# Altium PCB Pedal_Filters.PcbDoc (part 2 of 4)
Units mm, origin at the board's own origin, x right, y up, seen from the top; angles counter-clockwise.
Board outline 120.65 x 86.55 mm, 4 copper layers (Top Layer, Layer 1, Layer 2, Bottom Layer); 245 components, 181 nets, 879 pads, 470 vias.
Unrouted connection lines stored in the file: 24.
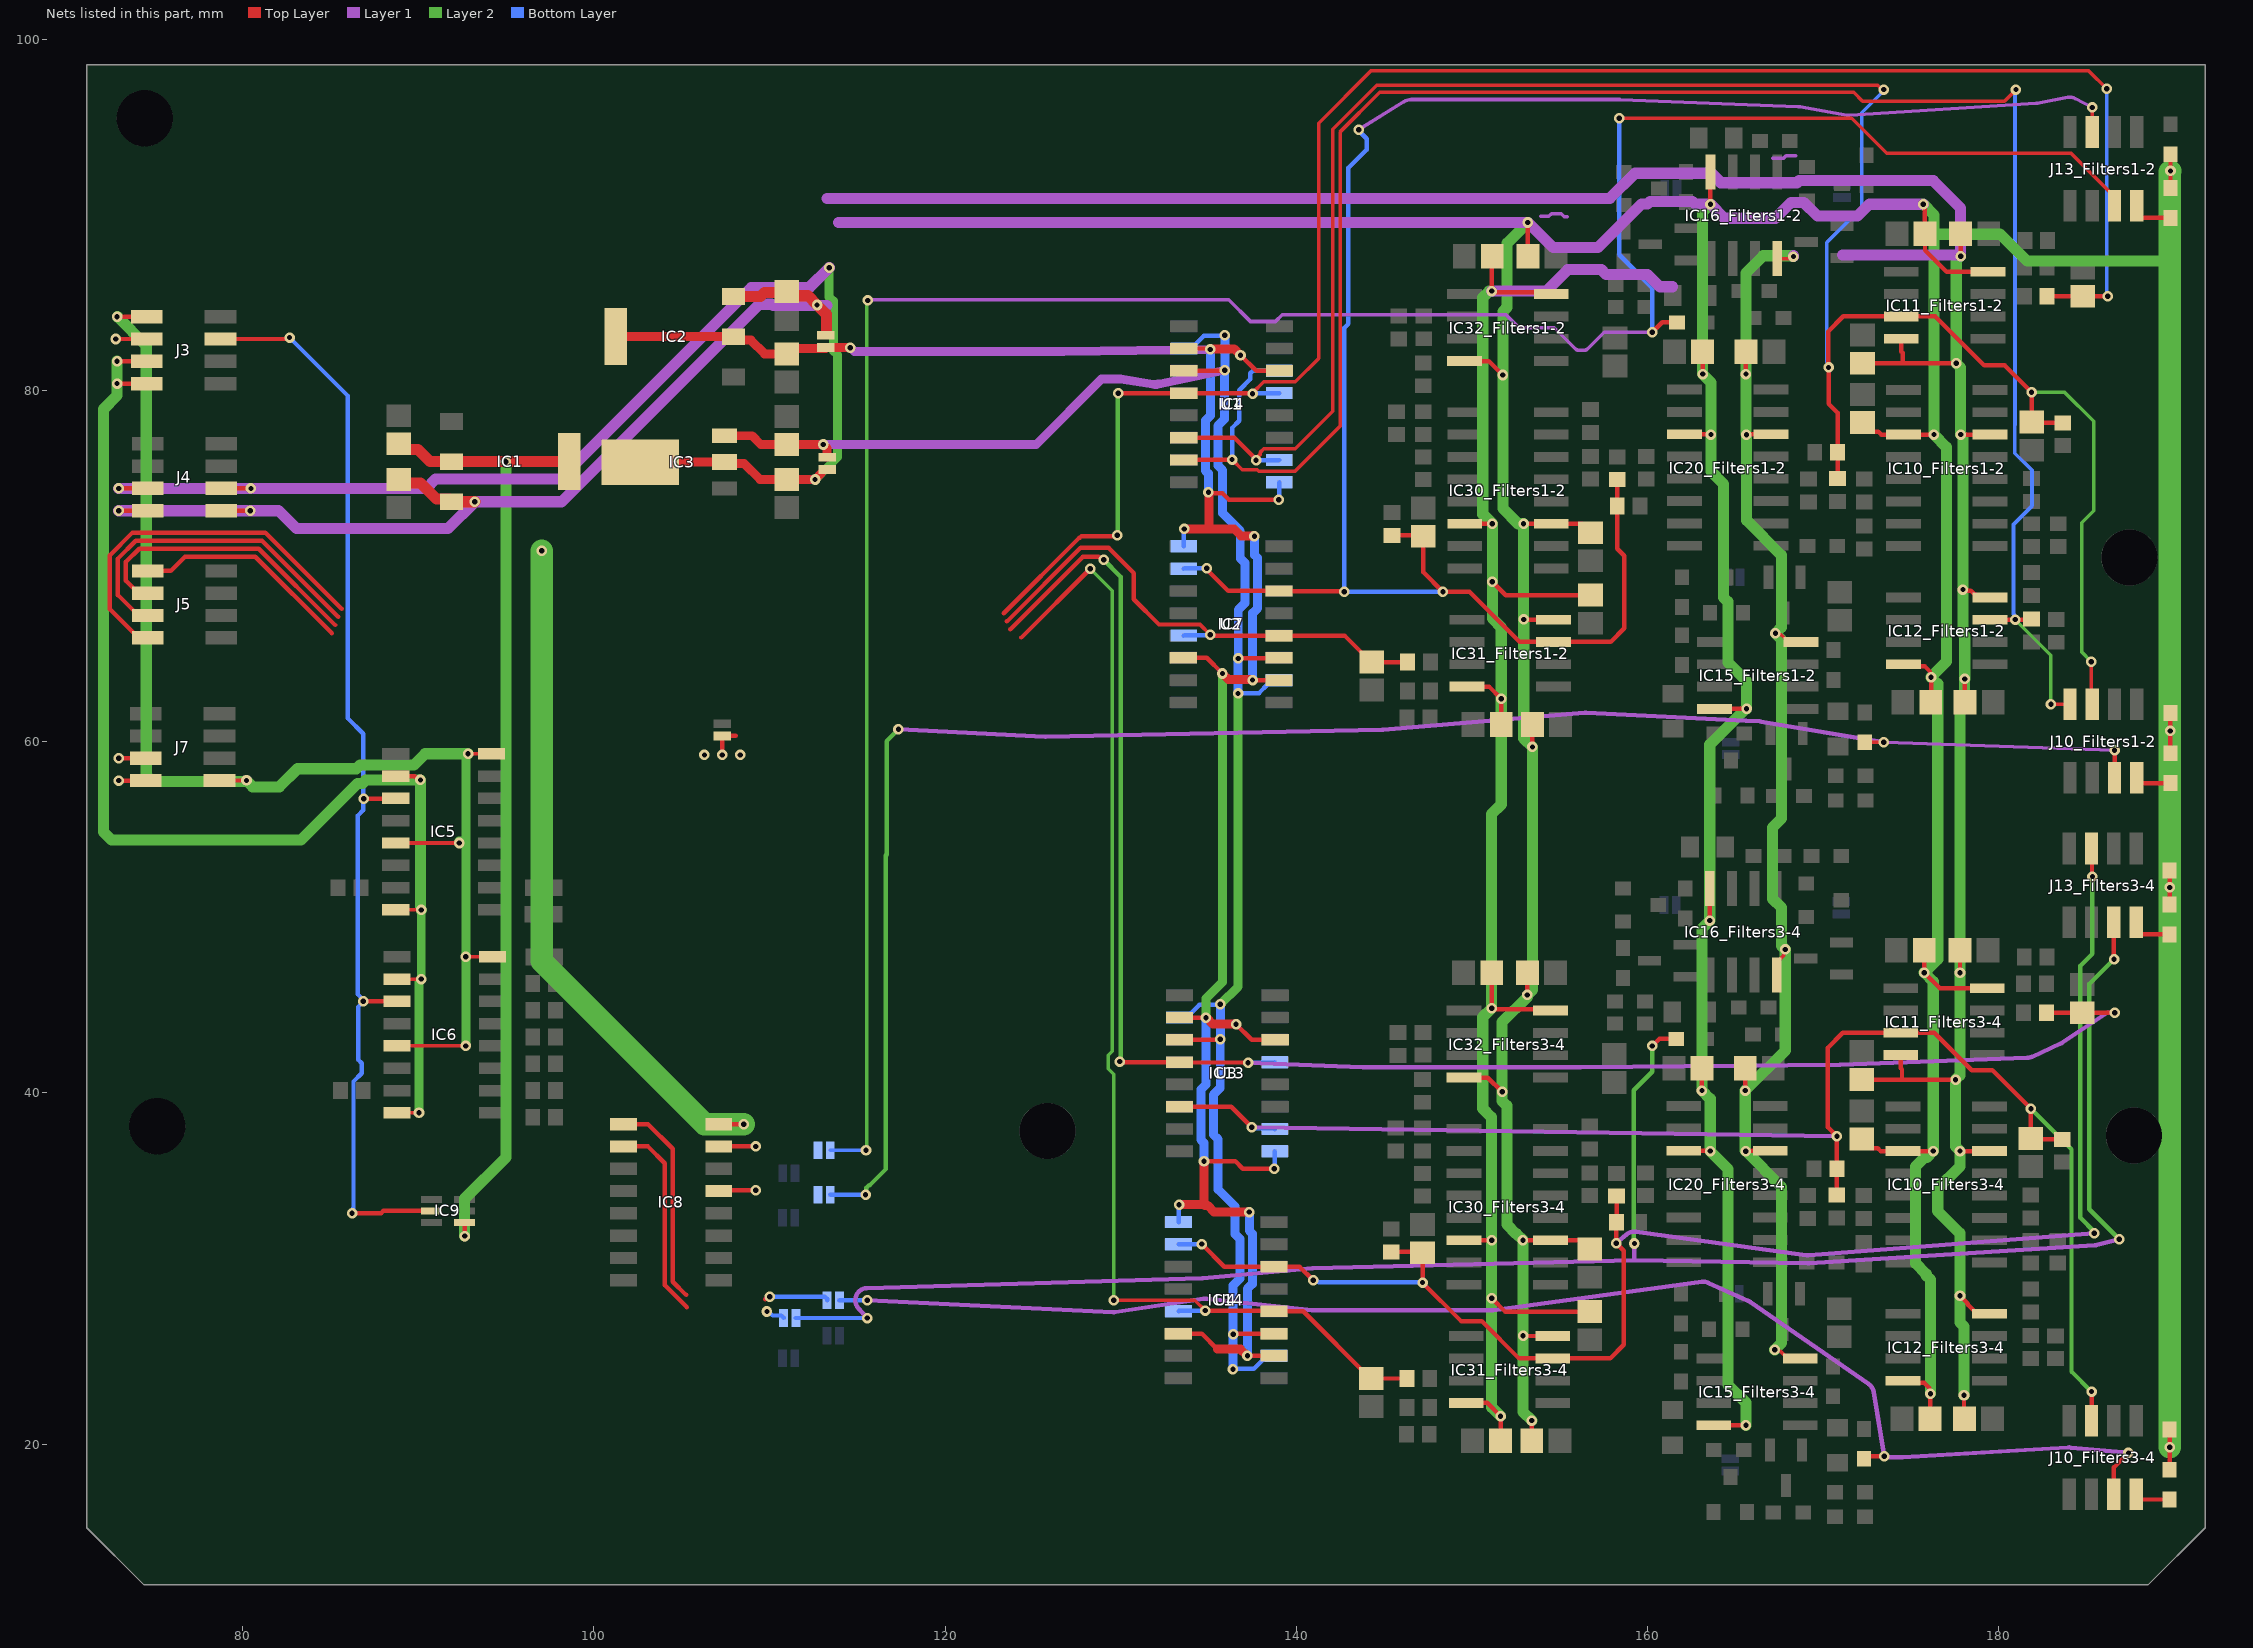
[diagram p4: the nets of this part, all layers, seen from the top]

## Part data
C1 C3 C7: library part EMK212B7105KGHTR, "CAP CER 1UF 16V X7R 0805", Capacitance="1 µF", Part Number=EMK212B7105KGHTR
C1_Filters1-2 C1_Filters3-4 C2_Filters1-2 C2_Filters3-4 C27_Filters1-2 C27_Filters3-4 C28_Filters1-2 C28_Filters3-4: library part GRM1885C1H103JA01D, "CAP CER 10000PF 50V C0G/NP0 0603", Device Package="0603 (1608 Metric)", Manufacturer="Murata Electronics", Operating Temperature="-55°C ~ 125°C", Supplier Part Number 1=490-9666-1-ND, Temperature Coefficient="C0G, NP0", Tolerance=±5%, Voltage - Rated=50V, Applications="General Purpose", Capacitance="10000 pF", ComponentLink1Description=Datasheet, ComponentLink1URL=https://www.murata.com/~/media/webrenewal/support/library/catalog/products/capacitor/mlcc/c02e.ashx?la=en-us, ComponentLink2Description="DigiKey Link", ComponentLink2URL=https://www.digikey.com/en/products/detail/murata-electronics/GRM1885C1H103JA01D/4421555, LastUpdated="7/20/2024 12:23:21 AM", Lifecycle Status=Active, Minimum Order=1, Mounting Type="Surface Mount, MLCC", Package / Case="0603 (1608 Metric)", Packaging=TapeAndReel, Part Number=GRM1885C1H103JA01D, Part Status=Active, PartId=11077, Price=0.02, Series=GRM, Size / Dimension="0.063\" L x 0.031\" W (1.60mm x 0.80mm)", Supplier 1=DigiKey, Thickness (Max)="0.035\" (0.90mm)"
C2 C4 C8: library part LMK212ABJ106KD-T, "CAP CER 10UF 10V X5R 0805", Capacitance="10 µF", Part Number=LMK212ABJ106KD-T
C5_Filters1-2 C5_Filters3-4 C6_Filters1-2 C6_Filters3-4 C11_Filters1-2 C11_Filters3-4 C12_Filters1-2 C12_Filters3-4: library part C0805X102J5HACAUTO, "CAP CER 0805 1NF 50V ULTRA STABL", Capacitance="1000 pF", Part Number=C0805X102J5HACAUTO
C9_Filters1-2 C9_Filters3-4 C10_Filters1-2 C10_Filters3-4 C13_Filters1-2 C13_Filters3-4 C14_Filters1-2 C14_Filters3-4 C15_Filters1-2 C15_Filters3-4 C16_Filters1-2 C16_Filters3-4 C17_Filters1-2 C17_Filters3-4 C18_Filters1-2 C18_Filters3-4 C19_Filters1-2 C19_Filters3-4 C20_Filters1-2 C20_Filters3-4 C21_Filters1-2 C21_Filters3-4 C22_Filters1-2 C22_Filters3-4 C23_Filters1-2 C23_Filters3-4 C24_Filters1-2 C24_Filters3-4 C25_Filters1-2 C25_Filters3-4 C26_Filters1-2 C26_Filters3-4: library part C0805C564K5RAC7800, "CAP CER 0.56UF 50V X7R 0805", Capacitance="0.56 µF", Part Number=C0805C564K5RAC7800
IC1: "Integrated Circuit", Manufacturer_Name="Advanced Monolithic Systems", Datasheet Link=http://www.advanced-monolithic.com/pdf/ds1117.pdf, Height=1.8mm, Manufacturer_Part_Number=AMS1117-5.0
IC2: library part AMS1117-5.0, "Integrated Circuit", Manufacturer_Name="Advanced Monolithic Systems", Datasheet Link=http://www.advanced-monolithic.com/pdf/ds1117.pdf, Height=1.8mm, Manufacturer_Part_Number=AMS1117-5.0
IC3: library part 79L06, "Integrated Circuit", Manufacturer_Name=MDD, Datasheet Link=https://datasheet.lcsc.com/szlcsc/1909231507_MDD-Microdiode-Electronics-79L06_C414030.pdf, Height=1.6mm, Manufacturer_Part_Number=79L06
IC4 IC7 IC13 IC14: "Integrated Circuit", Manufacturer_Name="Analog Devices", Manufacturer_Part_Number=DG409MY/PR-T
IC5 IC6: "Integrated Circuit", Arrow Part Number=74HC595D(BJ), Manufacturer_Name=Toshiba, Mouser Part Number=757-74HC595DBJ, Arrow Price/Stock=https://www.arrow.com/en/products/74hc595d-bj/toshiba?region=nac, Datasheet Link=https://componentsearchengine.com/Datasheets/1/74HC595D(BJ).pdf, Height=1.75mm, Manufacturer_Part_Number=74HC595D(BJ), Mouser Price/Stock=https://www.mouser.co.uk/ProductDetail/Toshiba/74HC595DBJ?qs=T%2FywbITssnTkqd02WdSNRg%3D%3D
IC8: "Integrated Circuit", Manufacturer_Name=onsemi, Mouser Part Number=512-CD4051BCM, Datasheet Link=https://media.digikey.com/pdf/Data%20Sheets/Fairchild%20PDFs/CD4051BC.pdf, Height=1.753mm, Manufacturer_Part_Number=CD4051BCM, Mouser Price/Stock=https://www.mouser.com/Search/Refine.aspx?Keyword=512-CD4051BCM
IC9: "Integrated Circuit", Manufacturer_Name="Texas Instruments", Mouser Part Number=595-DAC7311IDCKR, Arrow Part Number=DAC7311IDCKR, Arrow Price/Stock=https://www.arrow.com/en/products/dac7311idckr/texas-instruments?region=nac, Datasheet Link=https://datasheet.lcsc.com/szlcsc/Texas-Instruments-TI-DAC7311IDCKR_C128601.pdf, Height=1.1mm, Manufacturer_Part_Number=DAC7311IDCKR, Mouser Price/Stock=https://www.mouser.co.uk/ProductDetail/Texas-Instruments/DAC7311IDCKR?qs=z3YOdW4mbAwW%2FH6OJTW4CQ%3D%3D
IC10_Filters1-2 IC10_Filters3-4 IC20_Filters1-2 IC20_Filters3-4 IC30_Filters1-2 IC30_Filters3-4: "Integrated Circuit", Arrow Part Number=LM13700N/NOPB, Manufacturer_Name="Texas Instruments", Mouser Part Number=926-LM13700N/NOPB, Arrow Price/Stock=https://www.arrow.com/en/products/lm13700nnopb/texas-instruments?region=nac, Datasheet Link=http://www.ti.com/lit/ds/symlink/lm13700.pdf, Height=4.318mm, Manufacturer_Part_Number=LM13700N/NOPB, Mouser Price/Stock=https://www.mouser.co.uk/ProductDetail/Texas-Instruments/LM13700N-NOPB?qs=X1J7HmVL2ZFKw9D7azZDXw%3D%3D
IC11_Filters1-2 IC11_Filters3-4 IC12_Filters1-2 IC12_Filters3-4 IC15_Filters1-2 IC15_Filters3-4 IC16_Filters1-2 IC16_Filters3-4 IC31_Filters1-2 IC31_Filters3-4 IC32_Filters1-2 IC32_Filters3-4: "Integrated Circuit", Manufacturer_Name="Texas Instruments", Mouser Part Number=595-TL072ACP, Arrow Part Number=TL072ACP, Arrow Price/Stock=https://www.arrow.com/en/products/tl072acp/texas-instruments?utm_currency=USD&region=europe, Datasheet Link=http://www.ti.com/lit/ds/symlink/tl071a.pdf, Height=5.08mm, Manufacturer_Part_Number=TL072ACP, Mouser Price/Stock=https://www.mouser.co.uk/ProductDetail/Texas-Instruments/TL072ACP?qs=0OT4q4QBUTLFvIZ%252B%2FvrwoQ%3D%3D
J1 J2 J6 J8_Filters1-2 J8_Filters3-4 J9_Filters1-2 J9_Filters3-4 J11_Filters1-2 J11_Filters3-4 J12_Filters1-2 J12_Filters3-4 J14 J15 J16 J17 J18 J19 J20 J21: library part Jumper_single, CommentText="\"Перемычка\""
J3 J4 J5 J7: "Connector", Manufacturer_Name=Sullins, Datasheet Link=https://www.sullinscorp.com/drawings/88_LPPB___2NFSS-RC,_11017.pdf, Height=4.65mm, Manufacturer_Part_Number=LPPB042NFSS-RC, System=Connector
J10_Filters1-2 J10_Filters3-4 J13_Filters1-2 J13_Filters3-4: library part LPPB042NFSS-RC, "Connector", Manufacturer_Name=Sullins, Datasheet Link=https://www.sullinscorp.com/drawings/88_LPPB___2NFSS-RC,_11017.pdf, Height=4.65mm, Manufacturer_Part_Number=LPPB042NFSS-RC
Q1_Filters1-2 Q1_Filters3-4 Q2_Filters1-2 Q2_Filters3-4 Q5_Filters1-2 Q5_Filters3-4 Q6_Filters1-2 Q6_Filters3-4: "TRANS NPN 40V 0.2A SOT23-3", Current - Collector (Ic) (Max)="200 mA", Current - Collector Cutoff (Max)="50nA (ICBO)", DC Current Gain (hFE) (Min) @ Ic, Vce="100 @ 10mA, 1V", Frequency - Transition=300MHz, Manufacturer="Diodes Incorporated", Operating Temperature="-55°C ~ 150°C (TJ)", Package / Case="TO-236-3, SC-59, SOT-23-3", Power - Max="300 mW", Supplier Device Package=SOT-23-3, Supplier Part Number 1=MMBT3904-FDICT-ND, Voltage - Collector Emitter Breakdown (Max)="40 V", ComponentLink1Description=Datasheet, ComponentLink1URL=https://www.diodes.com/assets/Datasheets/ds30036.pdf, ComponentLink2Description="DigiKey Link", ComponentLink2URL=https://www.digikey.com/en/products/detail/diodes-incorporated/MMBT3904-7-F/814494, LastUpdated="2/8/2024 9:54:04 PM", Lifecycle Status=Active, Minimum Order=1, Mounting Type="Surface Mount", Packaging=TapeAndReel, Part Number=MMBT3904-7-F, Part Status=Active, PartId=85, Price=0.01, Series=-, Supplier 1=DigiKey, Transistor Type=NPN, Vce Saturation (Max) @ Ib, Ic="300mV @ 5mA, 50mA"
Q3_Filters1-2 Q3_Filters3-4 Q4_Filters1-2 Q4_Filters3-4 Q7_Filters1-2 Q7_Filters3-4 Q8_Filters1-2 Q8_Filters3-4: library part MMBT3906
R1_Filters1-2 R1_Filters3-4 R3_Filters1-2 R3_Filters3-4 R12_Filters1-2 R12_Filters3-4 R14_Filters1-2 R14_Filters3-4 R17_Filters1-2 R17_Filters3-4 R19_Filters1-2 R19_Filters3-4 R21 R22 R30_Filters1-2 R30_Filters3-4 R32_Filters1-2 R32_Filters3-4 R33 R34 R35 R36 R37 R38 R39 R40 R41: library part CRCW0603220RFKEA, "RES SMD 220 OHM 1% 1/10W 0603", Part Number=CRCW0603220RFKEA
R2_Filters1-2 R2_Filters3-4 R10_Filters1-2 R10_Filters3-4 R11_Filters1-2 R11_Filters3-4 R20_Filters1-2 R20_Filters3-4 R23_Filters1-2 R23_Filters3-4 R31_Filters1-2 R31_Filters3-4: library part CPF0603F100KC1, "RES SMD 100K OHM 1% 1/16W 0603", Part Number=CPF0603F100KC1
R4_Filters1-2 R4_Filters3-4 R7_Filters1-2 R7_Filters3-4 R8_Filters1-2 R8_Filters3-4 R9_Filters1-2 R9_Filters3-4 R13_Filters1-2 R13_Filters3-4 R15_Filters1-2 R15_Filters3-4 R16_Filters1-2 R16_Filters3-4 R18_Filters1-2 R18_Filters3-4 R24_Filters1-2 R24_Filters3-4 R25_Filters1-2 R25_Filters3-4 R26_Filters1-2 R26_Filters3-4 R29_Filters1-2 R29_Filters3-4: library part CRCW060310K0FKEA, "RES SMD 10K OHM 1% 1/10W 0603", Part Number=CRCW060310K0FKEA
R5_Filters1-2 R5_Filters3-4 R6_Filters1-2 R6_Filters3-4 R27_Filters1-2 R27_Filters3-4 R28_Filters1-2 R28_Filters3-4: library part CRCW060347K0FKEAHP, "RES SMD 47K OHM 1% 1/3W 0603", Part Number=CRCW060347K0FKEAHP
R42_Filters1-2 R42_Filters3-4 R44_Filters1-2 R44_Filters3-4 R52_Filters1-2 R52_Filters3-4 R54_Filters1-2 R54_Filters3-4: library part AC0603FR-0733KL, "RES SMD 33K OHM 1% 1/10W 0603", Device Package="0603 (1608 Metric)", Manufacturer=Yageo, Operating Temperature="-55°C ~ 155°C", Power (Watts)="0.1W, 1/10W", Ratings=AEC-Q200, Supplier Device Package=0603, Supplier Part Number 1=YAG3598CT-ND, Temperature Coefficient=±100ppm/°C, Tolerance=±1%, ComponentLink1Description=Datasheet, ComponentLink1URL=https://www.yageo.com/upload/media/product/productsearch/datasheet/rchip/PYu-AC_51_RoHS_L_7.pdf, ComponentLink2Description="DigiKey Link", ComponentLink2URL=https://www.digikey.com/en/products/detail/yageo/AC0603FR-0733KL/5896041, Composition="Thick Film", Features="Automotive AEC-Q200, Moisture Resistant", Height - Seated (Max)="0.022\" (0.55mm)", LastUpdated="7/25/2024 9:19:23 AM", Lifecycle Status=Active, Minimum Order=1, Number of Terminations=2, Package / Case="0603 (1608 Metric)", Packaging=CutTape, Part Number=AC0603FR-0733KL, Part Status=Active, PartId=17385, Price=0.01, Resistance="33 kOhms", Series=AC, Size / Dimension="0.063\" L x 0.031\" W (1.60mm x 0.80mm)", Supplier 1=DigiKey
R43_Filters1-2 R43_Filters3-4 R45_Filters1-2 R45_Filters3-4 R53_Filters1-2 R53_Filters3-4 R55_Filters1-2 R55_Filters3-4: library part AA0603FR-071KL, "RES SMD 1K OHM 1% 1/10W 0603", Device Package="0603 (1608 Metric)", Manufacturer=Yageo, Operating Temperature="-55°C ~ 155°C", Power (Watts)="0.1W, 1/10W", Ratings=AEC-Q200, Supplier Device Package=0603, Supplier Part Number 1=13-AA0603FR-071KLCT-ND, Temperature Coefficient=±150ppm/°C, Tolerance=±1%, ComponentLink1Description=Datasheet, ComponentLink1URL=https://www.yageo.com/upload/media/product/productsearch/datasheet/rchip/PYu-AA_51_RoHS_L_3.pdf, ComponentLink2Description="DigiKey Link", ComponentLink2URL=https://www.digikey.com/en/products/detail/yageo/AA0603FR-071KL/5888847, Composition="Thick Film", Features="Anti-Sulfur, Automotive AEC-Q200, Moisture Resistant", Height - Seated (Max)="0.022\" (0.55mm)", LastUpdated="7/25/2024 9:19:15 AM", Lifecycle Status=Active, Minimum Order=1, Number of Terminations=2, Package / Case="0603 (1608 Metric)", Packaging=TapeAndReel, Part Number=AA0603FR-071KL, Part Status=Active, PartId=64335, Price=0.01, Resistance="1 kOhms", Series=AA, Size / Dimension="0.063\" L x 0.031\" W (1.60mm x 0.80mm)", Supplier 1=DigiKey
R46_Filters1-2 R46_Filters3-4 R56_Filters1-2 R56_Filters3-4 R57_Filters1-2 R57_Filters3-4 R63_Filters1-2 R63_Filters3-4: library part AC0603FR-07120KL, "RES SMD 120K OHM 1% 1/10W 0603", Device Package="0603 (1608 Metric)", Manufacturer=Yageo, Operating Temperature="-55°C ~ 155°C", Power (Watts)="0.1W, 1/10W", Ratings=AEC-Q200, Supplier Device Package=0603, Supplier Part Number 1=YAG3562CT-ND, Temperature Coefficient=±100ppm/°C, Tolerance=±1%, ComponentLink1Description=Datasheet, ComponentLink1URL=https://www.yageo.com/upload/media/product/productsearch/datasheet/rchip/PYu-AC_51_RoHS_L_7.pdf, ComponentLink2Description="DigiKey Link", ComponentLink2URL=https://www.digikey.com/en/products/detail/yageo/AC0603FR-07120KL/5895760, Composition="Thick Film", Features="Automotive AEC-Q200, Moisture Resistant", Height - Seated (Max)="0.022\" (0.55mm)", LastUpdated="7/25/2024 9:19:23 AM", Lifecycle Status=Active, Minimum Order=1, Number of Terminations=2, Package / Case="0603 (1608 Metric)", Packaging=CutTape, Part Number=AC0603FR-07120KL, Part Status=Active, PartId=17461, Price=0.01, Resistance="120 kOhms", Series=AC, Size / Dimension="0.063\" L x 0.031\" W (1.60mm x 0.80mm)", Supplier 1=DigiKey
R47_Filters1-2 R47_Filters3-4 R48_Filters1-2 R48_Filters3-4 R58_Filters1-2 R58_Filters3-4 R59_Filters1-2 R59_Filters3-4: library part AC0603FR-07330KL, "RES SMD 330K OHM 1% 1/10W 0603", Device Package="0603 (1608 Metric)", Manufacturer=Yageo, Operating Temperature="-55°C ~ 155°C", Power (Watts)="0.1W, 1/10W", Ratings=AEC-Q200, Supplier Device Package=0603, Supplier Part Number 1=YAG3594CT-ND, Temperature Coefficient=±100ppm/°C, Tolerance=±1%, ComponentLink1Description=Datasheet, ComponentLink1URL=https://www.yageo.com/upload/media/product/productsearch/datasheet/rchip/PYu-AC_51_RoHS_L_7.pdf, ComponentLink2Description="DigiKey Link", ComponentLink2URL=https://www.digikey.com/en/products/detail/yageo/AC0603FR-07330KL/5896036, Composition="Thick Film", Features="Automotive AEC-Q200, Moisture Resistant", Height - Seated (Max)="0.022\" (0.55mm)", LastUpdated="7/25/2024 9:19:23 AM", Lifecycle Status=Active, Minimum Order=1, Number of Terminations=2, Package / Case="0603 (1608 Metric)", Packaging=CutTape, Part Number=AC0603FR-07330KL, Part Status=Active, PartId=17469, Price=0.01, Resistance="330 kOhms", Series=AC, Size / Dimension="0.063\" L x 0.031\" W (1.60mm x 0.80mm)", Supplier 1=DigiKey
R49_Filters1-2 R49_Filters3-4 R50_Filters1-2 R50_Filters3-4 R51_Filters1-2 R51_Filters3-4 R60_Filters1-2 R60_Filters3-4 R61_Filters1-2 R61_Filters3-4 R62_Filters1-2 R62_Filters3-4: library part AC0603FR-076K8L, "RES SMD 6.8K OHM 1% 1/10W 0603", Device Package="0603 (1608 Metric)", Manufacturer=Yageo, Operating Temperature="-55°C ~ 155°C", Power (Watts)="0.1W, 1/10W", Ratings=AEC-Q200, Supplier Device Package=0603, Supplier Part Number 1=YAG3627CT-ND, Temperature Coefficient=±100ppm/°C, Tolerance=±1%, ComponentLink1Description=Datasheet, ComponentLink1URL=https://www.yageo.com/upload/media/product/productsearch/datasheet/rchip/PYu-AC_51_RoHS_L_7.pdf, ComponentLink2Description="DigiKey Link", ComponentLink2URL=https://www.digikey.com/en/products/detail/yageo/AC0603FR-076K8L/5896266, Composition="Thick Film", Features="Automotive AEC-Q200, Moisture Resistant", Height - Seated (Max)="0.022\" (0.55mm)", LastUpdated="7/25/2024 9:19:23 AM", Lifecycle Status=Active, Minimum Order=1, Number of Terminations=2, Package / Case="0603 (1608 Metric)", Packaging=CutTape, Part Number=AC0603FR-076K8L, Part Status=Active, PartId=17383, Price=0.01, Resistance="6.8 kOhms", Series=AC, Size / Dimension="0.063\" L x 0.031\" W (1.60mm x 0.80mm)", Supplier 1=DigiKey
U1 U2 U3 U4: "Undefined or Miscellaneous", Manufacturer_Name=onsemi, Mouser Part Number=512-CD4052BCM, Datasheet Link=https://datasheet.datasheetarchive.com/originals/distributors/Datasheets_SAMA/f70c20124315e8f3af2d52f76e34e12a.pdf, Height=1.753mm, Manufacturer_Part_Number=CD4052BCM, Mouser Price/Stock=https://www.mouser.co.uk/ProductDetail/onsemi-Fairchild/CD4052BCM?qs=ZhimqmYZ5InGEAD%2FeTU3GA%3D%3D

## Free pads (board coordinates)
  round 3.2 hole 3.2 unplated: 0(74.422,95.504) 0(75.138,38.1) 0(125.84,37.834) 0(187.446,70.492) 0(187.702,37.576)

## Via types
v1: diameter 0.6, hole 0.3, Top Layer to Bottom Layer, tented both sides, 470 vias

## Nets (pads, with @x,y where several pads share a name; then routed paths per layer and width w, separated by ;. In a path a pad name is that pad's centre, name@x,y a point inside that pad or via, vN(x,y) a via of type N, cw(c..) or ccw(c..) an arc to the next point about the centre after c; other vN are vias at no path point)
+5: IC5.10 IC5.16 IC6.10 IC6.16 J3.6 J3.8 | length 74.8
  Top Layer w0.203: IC5.16@88.715,50.419 v1(90.17,50.419) ; IC6.16@88.784,38.862 v1(90.043,38.862) ; IC6.10@88.784,46.482 v1(90.17,46.482)
  Top Layer w0.254: v1(72.852,80.391) J3.8@74.54,80.391 ; v1(72.852,81.661) J3.6@74.54,81.661 ; IC5.10@88.715,58.039 89.81,58.039 90.03,57.819 v1(90.124,57.819)
  Layer 2 w0.508: v1(90.043,38.862) 90.043,46.33 90.17,46.457 v1(90.17,46.482) v1(90.17,50.419)
  Layer 2 w0.635: v1(72.852,81.661) v1(72.852,80.391) 72.852,79.71 72.072,78.93 72.072,54.864 72.53,54.407 83.32,54.407 86.533,57.62 86.814,57.62 87.013,57.819 v1(90.124,57.819) 90.124,50.465 v1(90.17,50.419)
+5v_DAC: C2.2 IC1.2 IC1.4 IC9.4 | length 56
  Top Layer w0.254: v1(92.644,31.846) IC9.4@92.644,32.624
  Top Layer w0.635: C2.2@88.9,76.962 89.232,76.629 89.995,76.629 90.678,75.946 IC1.2@91.9,75.946 v1(94.996,75.946) IC1.4@98.6,75.946
  Layer 2 w0.635: v1(92.644,31.846) 92.644,33.97 94.996,36.322 v1(94.996,75.946)
+12: C1.2 C3.1 C13_Filters1-2.1 C13_Filters3-4.1 C14_Filters1-2.1 C14_Filters3-4.1 C15_Filters1-2.1 C15_Filters3-4.1 C16_Filters1-2.1 C16_Filters3-4.1 C17_Filters1-2.1 C17_Filters3-4.1 C18_Filters1-2.1 C18_Filters3-4.1 C19_Filters1-2.1 C19_Filters3-4.1 IC1.3 IC2.3 IC8.16 IC10_Filters1-2.11 IC10_Filters3-4.11 IC11_Filters1-2.4 IC11_Filters3-4.4 IC12_Filters1-2.4 IC12_Filters3-4.4 IC15_Filters1-2.8 IC15_Filters3-4.8 IC16_Filters1-2.8 IC16_Filters3-4.8 IC20_Filters1-2.11 IC20_Filters3-4.11 IC30_Filters1-2.11 IC30_Filters3-4.11 IC31_Filters1-2.8 IC31_Filters3-4.8 IC32_Filters1-2.8 IC32_Filters3-4.8 J1.2 J4.7 J4.8 R46_Filters1-2.1 R46_Filters3-4.1 R56_Filters1-2.1 R56_Filters3-4.1 R57_Filters1-2.1 R57_Filters3-4.1 R63_Filters1-2.1 R63_Filters3-4.1 | length 538.5
  Top Layer w0.254: v1(72.944,73.152) J4.8@74.586,73.152 ; J4.7@78.786,73.152 v1(80.428,73.152) ; IC8.16@107.115,38.22 v1(108.537,38.22) ; IC32_Filters3-4.8@149.552,40.875 149.558,40.869 150.915,40.869 v1(151.728,40.056) ; IC32_Filters1-2.8@149.949,81.677 150.971,81.677 v1(151.766,80.881) ; v1(152.908,31.608) IC30_Filters3-4.11@154.483,31.608 156.21,31.608 C19_Filters3-4.1@156.718,31.1 ; v1(152.92,26.161) 152.927,26.154 154.603,26.154 IC31_Filters3-4.8@154.61,26.147 ; v1(152.946,72.409) 156.248,72.409 C19_Filters1-2.1@156.756,71.901 ; v1(152.958,66.962) 152.965,66.955 154.641,66.955 IC31_Filters1-2.8@154.648,66.948 ; v1(153.162,45.578) C15_Filters3-4.1@153.162,46.848 ; v1(153.19,89.566) 153.19,87.66 C15_Filters1-2.1@153.2,87.649 ; C14_Filters3-4.1@153.416,20.178 v1(153.416,21.336) ; v1(153.454,59.699) C14_Filters1-2.1@153.454,60.979 ; IC20_Filters3-4.11@162.073,36.709 162.083,36.698 163.566,36.698 v1(163.576,36.688) ; IC20_Filters1-2.11@162.111,77.51 162.121,77.5 163.604,77.5 v1(163.614,77.489) ; v1(163.106,40.132) C18_Filters3-4.1@163.106,41.402 ; v1(163.144,80.933) C18_Filters1-2.1@163.144,82.203 ; v1(163.551,49.809) IC16_Filters3-4.8@163.551,51.638 ; v1(163.589,90.611) IC16_Filters1-2.8@163.589,92.439 ; IC15_Filters3-4.8@163.779,21.067 v1(165.608,21.067) ; IC15_Filters1-2.8@163.817,61.868 v1(165.646,61.868) ; C16_Filters3-4.1@172.212,37.374 172.735,36.851 173.116,36.851 173.279,36.688 v1(176.276,36.688) ; C16_Filters1-2.1@172.25,78.175 172.773,77.652 173.154,77.652 173.317,77.489 IC10_Filters1-2.11@174.587,77.489 v1(176.314,77.489) ; IC12_Filters3-4.4@174.549,23.607 174.673,23.483 175.765,23.483 176.05,23.198 ; IC12_Filters1-2.4@174.587,64.408 174.711,64.284 175.803,64.284 176.088,63.999 ; C13_Filters3-4.1@175.768,48.118 v1(175.768,46.848) 176.657,45.959 IC11_Filters3-4.4@179.349,45.959 ; C13_Filters1-2.1@175.806,88.919 v1@175.806,90.415 ; C13_Filters1-2.1@175.807,88.918 175.807,87.987 177.034,86.76 IC11_Filters1-2.4@179.387,86.76 ; C17_Filters3-4.1@176.098,21.448 176.116,21.466 v1(176.116,22.871) ; C17_Filters1-2.1@176.136,62.249 176.154,62.267 v1(176.154,63.673) ; R46_Filters3-4.1@189.738,18.542 R63_Filters3-4.1@189.738,20.828 ; R56_Filters3-4.1@189.738,50.722 189.75,50.734 189.75,52.644 R57_Filters3-4.1@189.738,52.656 ; R46_Filters1-2.1@189.776,59.343 R63_Filters1-2.1@189.776,61.629 ; R56_Filters1-2.1@189.776,91.523 189.788,91.535 189.788,93.445 R57_Filters1-2.1@189.776,93.457
  Top Layer w0.635: C1.2@88.9,74.93 89.106,74.724 90.122,74.724 91.033,73.813 91.742,73.813 IC1.3@91.9,73.656 91.904,73.66 v1(93.218,73.66) ; IC2.3@107.95,85.352 109.482,85.352 109.717,85.587 110.949,85.587 C3.1@110.998,85.636 111.237,85.397 112.186,85.397 v1(112.715,84.868) 113.243,84.339 J1.2@113.243,83.255
  Layer 1 w0.203: 153.924,89.916 154.386,89.916 154.54,90.07 155.083,90.07 155.259,89.895 155.427,89.895
  Layer 1 w0.635: v1(72.944,73.152) v1(80.428,73.152) 82.042,73.152 83.058,72.136 91.694,72.136 v1(93.218,73.66) 98.158,73.66 109.405,84.908 110.127,84.908 110.198,84.836 113.284,84.836 ; 113.95,89.566 v1(153.19,89.566) 154.618,88.138 157.184,88.138 159.674,90.628 160.013,90.628 160.154,90.77 162.553,90.77 162.711,90.611 v1(163.589,90.611) 164.393,89.806 167.276,89.806 168.181,90.711 168.903,90.711 169.684,89.929 171.971,89.929 172.649,90.607 v1(175.708,90.607)
  Layer 2 w0.635: v1(153.19,89.566) 152.006,88.382 152.006,84.74 151.766,84.5 151.766,73.278 152.635,72.409 v1(152.946,72.409) 152.946,66.974 v1(152.958,66.962) 152.958,60.195 v1(153.454,59.699) 153.454,45.87 v1(153.162,45.578) 153.162,45.466 151.728,44.032 151.728,39.534 151.999,39.263 151.999,32.504 152.528,31.975 152.541,31.975 v1(152.908,31.608) 152.908,26.173 v1(152.92,26.161) 152.92,21.832 v1(153.416,21.336) ; v1(163.589,90.611) 163.144,90.166 v1(163.144,80.933) 163.614,80.463 v1(163.614,77.489) 163.614,75.4 164.338,74.676 164.338,68.218 164.592,67.964 164.592,64.516 165.646,63.462 v1(165.646,61.868) ; v1@165.587,61.868 163.551,59.832 v1(163.551,49.809) 163.106,49.365 v1(163.106,40.132) 163.576,39.662 v1(163.576,36.688) 164.592,35.672 164.592,23.368 165.608,22.352 v1(165.608,21.067) ; v1(175.708,90.607) 176.314,90.001 176.314,88.9 ; v1(176.116,22.871) 176.116,29.37 175.877,29.609 175.877,29.683 175.26,30.3 175.26,35.799 175.782,36.321 175.909,36.321 v1(176.276,36.688) 176.276,46.34 v1(175.768,46.848) 176.53,47.61 176.53,63.297 v1(176.154,63.673) 177.038,64.556 177.038,76.765 v1(176.314,77.489) 176.314,88.9 ; 189.75,87.376 181.61,87.376 180.086,88.9 176.314,88.9
  Layer 2 w1.27: v1(97.028,70.866) 97.028,47.498 106.306,38.22 v1(108.537,38.22) ; v1(189.738,19.812) 189.75,19.824 v1(189.75,51.699) 189.75,87.376 189.75,92.462 v1(189.788,92.5)
  other v1: 189.776,60.613
+V_MUX: C4.2 IC2.2 IC2.4 IC4.2 IC4.14 IC7.2 IC7.14 IC13.2 IC13.14 IC14.2 IC14.14 J1.1 U1.16 U2.16 U3.16 U4.16 | length 137.1
  Top Layer w0.254: IC14.14@133.29,26.291 134.618,26.291 135.507,25.402 ; IC13.2@133.352,44.291 133.356,44.287 134.853,44.287 v1@134.878,44.263 ; IC7.14@133.581,64.772 134.909,64.772 v1(135.798,63.883) ; IC4.2@133.593,82.391 135.104,82.391 v1@135.132,82.363 ; v1(134.748,36.099) 136.539,36.099 136.96,35.678 v1(138.751,35.678) ; v1@135.065,74.136 135.81,74.136 136.168,73.778 v1(139.005,73.778) ; v1(136.572,43.91) 137.461,43.021 IC13.14@138.789,43.021 ; v1(136.826,82.01) 137.715,81.121 IC4.14@139.043,81.121 ; v1@137.201,25.049 137.226,25.025 138.723,25.025 IC14.2@138.727,25.021 ; v1@137.492,63.53 137.517,63.506 139.027,63.506 IC7.2@139.031,63.502
  Top Layer w0.508: IC2.4@101.25,83.062 IC2.2@107.95,83.062 108.144,82.868 108.942,82.868 109.73,82.08 C4.2@110.998,82.08 111.304,82.386 J1.1@113.197,82.386 ; J1.1@113.197,82.44 v1(114.598,82.44) ; v1(133.328,33.634) 134.746,33.634 ; v1(133.619,72.115) 135.037,72.115 ; v1(134.748,36.099) v1(134.748,36.099) 134.746,33.634 ; v1@134.878,44.263 134.88,44.266 134.9,44.266 135.256,43.91 v1(136.572,43.91) ; v1(135.002,74.199) 135.02,74.181 135.02,74.116 135.037,74.099 135.037,72.115 ; v1(135.111,82.338) 135.132,82.358 135.132,82.363 136.473,82.363 v1(136.826,82.01) ; 135.507,25.402 136.823,25.402 137.179,25.046 137.199,25.046 v1@137.201,25.049 ; v1(135.798,63.883) 136.151,63.53 v1@137.492,63.53 ; v1(137.331,33.213) 135.329,33.213 134.952,33.59 134.791,33.59 134.746,33.634 ; v1(137.622,71.694) 137.604,71.712 136.859,71.712 136.456,72.115 135.037,72.115
  Layer 1 w0.508: v1(114.598,82.44) 114.623,82.44 114.854,82.209 126.743,82.209 v1(135.111,82.338)
  Layer 2 w0.508: v1(134.857,44.283) 134.873,44.299 134.873,45.381 135.798,46.306 v1(135.798,63.883)
  Bottom Layer w0.254: U4.16@133.303,32.641 133.303,33.609 v1(133.328,33.634) ; U2.16@133.594,71.122 133.594,72.09 v1(133.619,72.115) ; v1(138.751,35.678) 138.776,35.703 U3.16@138.776,36.671 ; v1(139.005,73.778) 139.03,73.803 U1.16@139.03,74.771
  Bottom Layer w0.508: v1(134.748,36.099) 134.746,36.101 134.746,37.161 134.572,37.335 134.572,39.942 134.572,40.186 134.857,40.471 v1(134.857,44.283) ; v1(135.002,74.199) 135,74.201 135,75.261 134.826,75.435 134.826,78.042 134.826,78.286 135.111,78.571 v1@135.111,82.338 ; v1(137.222,25.029) 137.222,28.841 137.507,29.126 137.507,29.37 137.507,31.977 137.333,32.151 137.333,33.211 v1(137.331,33.213) ; v1(137.513,63.51) 137.513,67.322 137.798,67.607 137.798,67.851 137.798,70.458 137.624,70.632 137.624,71.692 v1(137.622,71.694)
-12: C7.1 C20_Filters1-2.2 C20_Filters3-4.2 C21_Filters1-2.2 C21_Filters3-4.2 C22_Filters1-2.2 C22_Filters3-4.2 C23_Filters1-2.2 C23_Filters3-4.2 C24_Filters1-2.2 C24_Filters3-4.2 C25_Filters1-2.2 C25_Filters3-4.2 C26_Filters1-2.2 C26_Filters3-4.2 IC3.2 IC3.4 IC10_Filters1-2.6 IC10_Filters3-4.6 IC11_Filters1-2.8 IC11_Filters3-4.8 IC12_Filters1-2.8 IC12_Filters3-4.8 IC15_Filters1-2.4 IC15_Filters3-4.4 IC16_Filters1-2.4 IC16_Filters3-4.4 IC20_Filters1-2.6 IC20_Filters3-4.6 IC30_Filters1-2.6 IC30_Filters3-4.6 IC31_Filters1-2.4 IC31_Filters3-4.4 IC32_Filters1-2.4 IC32_Filters3-4.4 J2.2 J4.5 J4.6 | length 431.7
  Top Layer w0.203: v1(167.25,25.367) 167.326,25.291 167.582,25.291 167.996,24.877 IC15_Filters3-4.4@168.707,24.877 ; v1(167.288,66.168) 167.364,66.092 167.62,66.092 168.034,65.678 IC15_Filters1-2.4@168.745,65.678 ; IC16_Filters3-4.4@167.361,46.711 167.361,47.422 167.775,47.836 167.775,48.091 v1(167.851,48.167) ; IC16_Filters1-2.4@167.399,87.512 168.096,87.512 168.208,87.623 v1(168.315,87.623)
  Top Layer w0.254: v1(72.944,74.422) J4.6@74.586,74.422 ; J4.5@78.786,74.422 v1(80.474,74.422) ; IC30_Filters3-4.6@149.555,31.608 v1(151.13,31.608) ; IC30_Filters1-2.6@149.593,72.409 v1(151.168,72.409) ; IC31_Filters3-4.4@149.682,22.337 149.697,22.352 150.876,22.352 v1(151.638,21.59) C21_Filters3-4.2@151.638,20.178 ; IC31_Filters1-2.4@149.72,63.138 150.984,63.138 v1(151.676,62.446) C21_Filters1-2.2@151.676,60.979 ; v1@151.122,85.617 151.142,85.597 154.406,85.597 IC32_Filters1-2.4@154.517,85.487 ; v1(151.13,28.306) 151.892,27.544 C25_Filters3-4.2@156.718,27.544 ; C22_Filters3-4.2@151.13,46.848 v1(151.13,44.816) 151.195,44.751 154.414,44.751 IC32_Filters3-4.4@154.479,44.685 ; v1(151.134,85.664) 151.134,87.615 C22_Filters1-2.2@151.168,87.649 ; v1(151.168,69.107) 151.93,68.345 C25_Filters1-2.2@156.756,68.345 ; v1(165.57,40.132) C26_Filters3-4.2@165.57,41.402 ; v1(165.6,36.681) 165.614,36.695 166.987,36.695 IC20_Filters3-4.6@167.001,36.709 ; v1(165.608,80.933) C26_Filters1-2.2@165.608,82.203 ; v1(165.638,77.483) 165.652,77.496 167.025,77.496 IC20_Filters1-2.6@167.039,77.51 ; C23_Filters3-4.2@172.212,40.752 174.498,40.752 ; C23_Filters1-2.2@172.25,81.553 174.536,81.553 ; IC11_Filters3-4.8@174.422,42.149 174.422,41.412 174.498,41.336 174.498,40.752 ; IC11_Filters1-2.8@174.46,82.95 174.46,82.214 174.536,82.137 174.536,81.553 ; v1(177.546,40.752) 174.498,40.752 ; v1(177.584,81.553) 174.536,81.553 ; v1(177.8,28.448) 178.254,27.994 178.254,27.929 178.765,27.417 IC12_Filters3-4.8@179.476,27.417 ; v1(177.8,36.688) IC10_Filters3-4.6@179.476,36.688 ; v1(177.8,46.848) C20_Filters3-4.2@177.8,48.118 ; v1(177.838,77.489) IC10_Filters1-2.6@179.514,77.489 ; v1(177.838,87.649) C20_Filters1-2.2@177.838,88.919 ; v1(177.966,68.664) 178.032,68.598 178.423,68.598 178.803,68.218 IC12_Filters1-2.8@179.514,68.218 ; v1(178.029,22.773) 178.029,21.473 C24_Filters3-4.2@178.054,21.448 ; v1(178.067,63.574) 178.067,62.274 C24_Filters1-2.2@178.092,62.249
  Top Layer w0.508: IC3.4@102.642,75.922 IC3.2@107.442,75.922 107.528,75.836 108.568,75.836 109.474,74.93 C7.1@110.998,74.93 v1(112.601,74.93) J2.2@112.932,75.261
  Layer 1 w0.203: 167.132,93.218 167.753,93.218 167.894,93.359 168.437,93.359
  Layer 1 w0.635: v1(72.944,74.422) v1(80.474,74.422) 90.462,74.422 90.991,74.952 98.066,74.952 108.966,85.852 112.268,85.852 v1(113.403,86.987) ; 113.284,90.932 157.851,90.932 159.291,92.371 163.639,92.371 164.178,91.832 168.526,91.832 168.642,91.948 176.276,91.948 177.838,90.386 v1(177.838,87.649) 177.764,87.724 171.102,87.724 ; v1(151.134,85.664) 154.244,85.664 155.465,86.885 157.371,86.885 157.642,86.614 160.003,86.614 160.713,85.904 161.435,85.904 ; v1(168.315,87.623) v1@168.315,87.674
  Layer 2 w0.508: v1(112.601,74.93) 113.876,76.205 113.876,82.019 113.639,82.256 113.639,85.086 113.403,85.323 v1(113.403,86.987)
  Layer 2 w0.635: v1(151.134,85.664) 150.994,85.664 150.622,85.292 150.622,72.955 v1(151.168,72.409) v1(151.168,69.107) 151.168,67.018 151.676,66.51 v1(151.676,62.446) 151.676,56.426 151.13,55.88 v1(151.13,44.816) 150.622,44.308 150.622,39.116 151.13,38.608 v1(151.13,31.608) v1(151.13,28.306) 151.13,22.098 v1(151.638,21.59) ; v1(167.25,25.367) 167.64,25.756 167.64,34.642 v1(165.6,36.681) 165.57,36.712 v1(165.57,40.132) 167.851,42.413 v1(167.851,48.167) 167.64,48.377 167.64,50.546 167.132,51.054 167.132,55.118 167.64,55.626 167.64,65.817 v1(167.288,66.168) 167.64,66.52 167.64,70.612 165.638,72.614 v1(165.638,77.483) 165.608,77.513 v1(165.608,80.933) 165.608,86.688 166.589,87.668 168.27,87.668 v1(168.315,87.623) ; v1(177.838,87.649) 177.584,87.395 v1(177.584,81.553) 177.838,81.299 v1(177.838,77.489) 177.966,77.361 v1(177.966,68.664) 177.966,66.128 178.067,66.027 v1(178.067,63.574) 178.054,63.561 178.054,62.23 177.8,61.976 v1(177.8,46.848) 177.8,41.006 v1(177.546,40.752) 177.546,36.942 v1(177.8,36.688) 177.8,35.814 176.53,34.544 176.53,33.274 177.8,32.004 v1(177.8,28.448) 177.8,26.924 178.029,26.695 v1(178.029,22.773)
-V_MUX: C8.1 IC3.3 IC4.3 IC7.3 IC13.3 IC14.3 J2.1 U1.7 U2.7 U3.7 U4.7 | length 112.3
  Top Layer w0.254: IC13.3@133.352,43.021 133.368,43.037 135.656,43.037 v1(135.672,43.053) ; IC4.3@133.593,81.121 135.894,81.121 v1(135.926,81.153) ; v1(136.407,26.259) 136.423,26.275 138.711,26.275 IC14.3@138.727,26.291 ; v1(136.698,64.74) 136.714,64.756 139.002,64.756 IC7.3@139.018,64.772
  Top Layer w0.508: IC3.3@107.442,77.422 109.014,77.422 109.512,76.924 C8.1@110.998,76.924 v1(113.068,76.924) 113.284,76.708 J2.1@113.284,76.2
  Layer 1 w0.508: v1(113.068,76.924) 125.184,76.924 128.909,80.649 129.989,80.649 131.846,80.352 ccw(c131.973,81.15) 132.139,80.359 v1(135.926,81.153)
  Layer 2 w0.508: v1(135.681,45.046) 136.689,46.054 v1(136.689,62.747)
  Bottom Layer w0.254: U3.7@133.352,44.291 133.765,44.291 133.988,44.514 133.988,44.523 134.489,45.024 135.659,45.024 v1(135.681,45.046) ; U1.7@133.606,82.391 134.019,82.391 134.242,82.614 134.242,82.623 134.743,83.124 135.913,83.124 v1(135.935,83.146) ; v1(136.398,24.266) 136.42,24.288 137.59,24.288 138.091,24.789 138.091,24.798 138.314,25.021 U4.7@138.727,25.021 ; v1(136.689,62.747) 136.711,62.769 137.881,62.769 138.382,63.27 138.382,63.279 138.605,63.502 U2.7@139.018,63.502
  Bottom Layer w0.508: v1(135.681,45.046) 135.681,43.062 v1(135.672,43.053) 135.672,40.28 135.283,39.892 135.283,39.647 135.283,37.63 135.556,37.357 135.556,34.497 136.523,33.53 136.523,31.955 136.796,31.682 136.796,29.665 136.796,29.42 136.407,29.032 v1(136.407,26.259) 136.398,26.25 v1(136.398,24.266) ; v1(135.935,83.146) 135.935,81.162 v1(135.926,81.153) 135.926,78.38 135.537,77.992 135.537,77.747 135.537,75.73 135.81,75.457 135.81,73.015 136.814,72.011 136.814,70.436 137.087,70.163 137.087,68.146 137.087,67.901 136.698,67.513 v1(136.698,64.74) 136.689,64.731 v1(136.689,62.747)
CLK: IC5.11 IC6.11 IC9.2 J3.3 | length 64.6
  Top Layer w0.203: J3.3@78.74,82.931 82.483,82.931 82.566,83.014 v1(82.673,83.014)
  Top Layer w0.254: v1(86.233,33.147) 87.884,33.147 88.011,33.274 IC9.2@90.744,33.274 ; v1(86.868,45.212) IC6.11@88.784,45.212 ; v1(86.891,56.746) 86.903,56.757 88.703,56.757 IC5.11@88.715,56.769
  Bottom Layer w0.254: v1(82.673,83.014) 85.975,79.712 85.975,61.345 86.868,60.452 v1@86.868,56.769 ; v1(86.233,33.147) 86.299,33.213 86.299,33.454 86.314,33.469 86.314,40.647 86.787,41.12 86.787,41.684 86.573,41.898 86.573,44.89 86.868,45.185 86.868,45.306 86.568,45.606 86.568,55.796 86.86,56.088 86.86,56.714 v1(86.891,56.746)
DGND: IC5.8 IC5.13 IC6.8 IC6.13 J3.2 J3.4 J6.1 J7.6 J7.7 J7.8 | length 83.7
  Top Layer w0.203: IC5.13@88.715,54.229 v1(92.329,54.229) ; IC6.13@88.784,42.672 v1(92.71,42.672) ; v1(92.71,47.752) IC6.8@94.234,47.752 ; v1(92.837,59.309) IC5.8@94.165,59.309
  Top Layer w0.254: v1(72.771,82.931) J3.4@74.54,82.931 ; v1(72.852,84.201) J3.2@74.54,84.201 ; v1(72.944,57.785) J7.8@74.481,57.785 ; v1(72.944,59.055) J7.6@74.481,59.055 ; J7.7@78.681,57.785 78.684,57.788 80.218,57.788 v1(80.221,57.79) ; v1(107.315,59.247) J6.1@107.315,60.325 108.077,60.325
  Layer 2 w0.508: v1(92.329,54.229) 92.329,54.356 92.71,54.356 ; v1(92.71,42.672) v1(92.71,47.752) 92.71,54.356 ; v1(92.837,59.309) 92.837,59.284 92.71,59.157 92.71,54.356
  Layer 2 w0.635: v1@72.874,84.201 74.509,82.566 74.509,58.109 74.881,57.737 80.167,57.737 v1(80.221,57.79) 80.21,57.779 80.58,57.409 82.084,57.409 83.134,58.458 86.467,58.458 86.683,58.674 89.747,58.674 90.382,59.309 v1(92.837,59.309)
  other v1: 106.299,59.247 108.331,59.247
F1: IC8.13 J14.1 | length 2.1
  Top Layer w0.254: IC8.13@107.115,34.41 107.154,34.448 v1(109.22,34.448)
F2: IC8.15 J16.1 | length 2.1
  Top Layer w0.254: IC8.15@107.115,36.95 v1(109.22,36.95)
F3: IC8.1 J18.1 | length 15.7
  Top Layer w0.254: IC8.1@101.691,38.22 103.086,38.22 104.496,36.81 104.496,29.245 105.25,28.49 ; v1@109.765,28.236 109.917,28.389 v1(110.011,28.389)
  Bottom Layer w0.254: v1(110.011,28.389) 113.161,28.389 113.284,28.266 J18.1@113.284,28.194
F4: IC8.2 J20.1 | length 12.6
  Top Layer w0.254: IC8.2@101.691,36.95 103.086,36.95 104.038,35.997 104.038,29.055 105.291,27.803
  Bottom Layer w0.254: v1(109.858,27.549) 109.952,27.549 110.179,27.322 110.683,27.322 110.806,27.199 J20.1@110.806,27.178
F_POT_T1_Filters1-2: J10_Filters1-2.1 R46_Filters1-2.2 | length 2
  Top Layer w0.254: J10_Filters1-2.1@187.871,57.896 188.124,57.643 R46_Filters1-2.2@189.776,57.643
F_POT_T1_Filters3-4: J10_Filters3-4.1 R46_Filters3-4.2 | length 2.1
  Top Layer w0.254: J10_Filters3-4.1@187.833,17.136 187.833,17.095 188.086,16.842 R46_Filters3-4.2@189.738,16.842
F_POT_T2_Filters1-2: J13_Filters1-2.1 R56_Filters1-2.2 | length 2.5
  Top Layer w0.254: J13_Filters1-2.1@187.871,90.517 187.871,90.076 188.124,89.823 R56_Filters1-2.2@189.776,89.823
F_POT_T2_Filters3-4: J13_Filters3-4.1 R56_Filters3-4.2 | length 2.5
  Top Layer w0.254: J13_Filters3-4.1@187.833,49.716 187.833,49.275 188.086,49.022 R56_Filters3-4.2@189.738,49.022
F_POT_W1_Filters1-2: J10_Filters1-2.3 J14.2 R47_Filters1-2.1 | length 101.4
  Top Layer w0.203: R47_Filters1-2.1@172.377,59.963 v1(173.463,59.963)
  Top Layer w0.254: J10_Filters1-2.3@186.601,57.937 v1(186.601,59.507)
  Layer 1 w0.203: v1(173.463,59.963) v1(186.601,59.507)
  Layer 1 w0.254: v1(117.348,60.706) 125.695,60.28 ccw(c125.73,60.96) 125.744,60.279 144.901,60.686 ccw(c144.887,61.367) 144.944,60.688 156.422,61.651 cw(c156.479,60.972) 156.514,61.653 165.611,61.188 ccw(c165.646,61.868) 165.614,61.188 166.391,61.151 cw(c166.359,60.471) 166.472,61.143 v1(173.463,59.963)
  Layer 2 w0.254: v1(115.474,34.194) 115.524,34.244 115.524,34.6 115.673,34.749 115.722,34.749 116.637,35.664 116.637,53.529 116.67,53.563 116.67,60.028 v1(117.348,60.706)
  Bottom Layer w0.254: J14.2@113.467,34.194 v1(115.474,34.194)
F_POT_W1_Filters3-4: J10_Filters3-4.3 J18.2 R47_Filters3-4.1 | length 82.7
  Top Layer w0.254: R47_Filters3-4.1@172.339,19.162 172.481,19.304 v1(173.482,19.304) ; J10_Filters3-4.3@186.563,17.136 186.566,17.139 186.566,18.671 v1(187.39,19.495)
  Layer 1 w0.254: v1(115.57,28.194) 129.574,27.514 ccw(c129.607,28.194) 129.709,27.521 134.717,28.276 cw(c134.819,27.603) 134.892,28.28 140.897,27.629 ccw(c140.97,28.306) 140.97,27.625 151.13,27.625 ccw(c151.13,28.306) 151.221,27.631 163.095,29.235 cw(c163.187,28.56) 163.467,29.181 165.744,28.152 cw(c165.463,27.532) 165.851,28.092 172.6,23.42 cw(c172.212,22.86) 172.884,22.97 v1(173.482,19.304) ; v1(187.39,19.495) 184.105,19.802 ccw(c183.999,18.669) 183.931,19.805 174.539,19.244 cw(c174.498,19.924) 174.495,19.243 173.706,19.246 cw(c173.707,19.5) 173.632,19.257 v1(173.482,19.304) ; v1(173.482,19.304) 173.474,19.312 v1(173.482,19.304)
  Bottom Layer w0.254: J18.2@113.984,28.194 v1(115.57,28.194)
F_POT_W2_Filters1-2: J13_Filters1-2.3 J16.2 R58_Filters1-2.1 | length 142.3
  Top Layer w0.203: v1(158.402,95.507) 171.635,95.507 173.629,93.512 184.126,93.512 186.601,91.037 J13_Filters1-2.3@186.601,90.517
  Top Layer w0.254: v1(160.274,83.312) 160.842,83.88 R58_Filters1-2.1@161.684,83.88
  Layer 1 w0.203: v1(115.597,85.129) 115.633,85.165 136.157,85.165 137.396,83.926 138.822,83.926 139.213,84.317 151.948,84.317 152.689,83.576 154.695,83.576 155.917,82.354 ccw(c156.06,82.499) 156.059,82.295 156.245,82.295 ccw(c156.248,82.95) 156.248,82.295 156.435,82.295 ccw(c156.435,82.498) 156.579,82.354 157.537,83.312 v1(160.274,83.312)
  Layer 2 w0.203: v1(115.499,36.73) 115.534,36.766 115.534,85.066 v1(115.597,85.129)
  Bottom Layer w0.203: J16.2@113.466,36.73 v1(115.499,36.73)
  Bottom Layer w0.254: v1(158.402,95.507) 158.401,87.725 160.274,85.852 v1(160.274,83.312)
F_POT_W2_Filters3-4: J13_Filters3-4.3 J20.2 R58_Filters3-4.1 | length 111.3
  Top Layer w0.254: v1(160.274,42.672) 160.281,42.672 160.687,43.078 R58_Filters3-4.1@161.646,43.078 ; J13_Filters3-4.3@186.563,49.716 186.569,49.71 186.569,47.619 v1(186.575,47.613)
  Layer 1 w0.254: v1(115.57,27.178) 115.065,27.738 cw(c115.57,28.194) 115.55,28.875 134.639,29.446 ccw(c134.619,30.127) 134.679,29.449 140.91,30 cw(c140.97,29.322) 140.952,30.003 159.251,30.48 cw(c159.258,30.226) 159.258,30.48 ; v1(159.258,31.421) 159.258,30.48 ; v1(186.863,31.669) 185.611,31.345 cw(c185.441,32.004) 185.484,31.324 169.204,30.287 cw(c169.132,31.423) 169.109,30.285 159.263,30.48 ccw(c159.258,30.226) 159.258,30.48
  Layer 2 w0.254: 159.219,36.591 159.219,40.144 160.274,41.199 v1(160.274,42.672) ; 159.219,36.59 159.219,31.46 v1(159.258,31.421) ; v1(186.575,47.613) 185.166,46.204 185.166,33.366 v1(186.863,31.669)
  Bottom Layer w0.254: J20.2@111.506,27.178 v1(115.57,27.178)
Fbp1_Filters1-2: C6_Filters1-2.1 IC4.6 IC11_Filters1-2.7 J10_Filters1-2.6 R4_Filters1-2.1 R9_Filters1-2.2 R15_Filters1-2.2 U1.15 | length 123.5
  Top Layer w0.203: v1@137.701,76.145 137.728,76.145 137.963,76.38 137.963,76.492 138.152,76.681 139.944,76.681 142.089,78.826 142.089,94.885 144.585,97.381 173.108,97.381 173.354,97.134 v1(173.462,97.134) ; v1(185.279,64.552) 185.279,62.189 J10_Filters1-2.6@185.331,62.137
  Top Layer w0.254: IC4.6@133.593,77.311 136.484,77.311 v1@137.65,76.145 ; v1@170.299,81.311 170.316,81.294 170.316,79.248 170.828,78.737 R4_Filters1-2.1@170.828,74.979 ; v1@170.299,81.327 170.299,83.359 171.16,84.22 176.38,84.22 179.174,81.426 180.353,81.426 v1(181.877,79.902) C6_Filters1-2.1@181.877,78.2 181.923,78.154 R9_Filters1-2.2@183.655,78.154
  Layer 2 w0.203: v1(181.877,79.902) 183.75,79.902 185.41,78.242 185.41,73.142 184.728,72.46 184.728,65.103 v1(185.279,64.552)
  Bottom Layer w0.203: 170.212,81.628 170.212,88.424 172.212,90.424 172.212,95.819 173.462,97.069 v1(173.462,97.134)
  Bottom Layer w0.254: v1(137.714,76.023) 139.012,76.023 U1.15@139.03,76.041
  other v1: 170.316,81.311
Fbp1_Filters3-4: C6_Filters3-4.1 IC11_Filters3-4.7 IC13.6 J10_Filters3-4.6 R4_Filters3-4.1 R9_Filters3-4.2 R15_Filters3-4.2 U3.15 | length 84.3
  Top Layer w0.254: IC13.6@133.352,39.211 136.294,39.211 v1(137.46,38.045) ; R4_Filters3-4.1@170.79,34.178 v1(170.79,37.522) 170.261,38.051 170.261,42.558 171.122,43.419 176.342,43.419 178.468,41.293 179.646,41.293 v1(181.839,39.101) C6_Filters3-4.1@181.839,37.399 181.885,37.353 R9_Filters3-4.2@183.617,37.353 ; J10_Filters3-4.6@185.293,21.336 v1(185.293,22.987)
  Layer 1 w0.254: v1(137.46,38.045) v1(170.79,37.522)
  Layer 2 w0.254: v1(181.839,39.101) 184.15,36.79 184.15,24.13 v1(185.293,22.987)
  Bottom Layer w0.254: v1(137.46,38.045) 137.512,37.993 138.724,37.993 U3.15@138.776,37.941
Fbp2_Filters1-2: C11_Filters1-2.1 IC7.6 IC31_Filters1-2.7 J13_Filters1-2.6 R16_Filters1-2.2 R24_Filters1-2.2 R29_Filters1-2.1 U2.15 | length 112.2
  Top Layer w0.203: J13_Filters1-2.6@185.331,94.717 v1(185.331,96.118)
  Top Layer w0.254: v1(134.91,69.87) 134.91,69.799 136.127,68.582 137.248,68.582 IC7.6@139.018,68.582 139.043,68.556 142.716,68.556 v1(142.742,68.531) ; R24_Filters1-2.2@145.453,71.744 147.185,71.744 C11_Filters1-2.1@147.231,71.698 147.231,69.659 v1(148.353,68.537) 149.868,68.537 152.727,65.678 IC31_Filters1-2.7@154.648,65.678 157.913,65.678 158.687,66.452 158.687,70.583 158.28,70.991 R29_Filters1-2.1@158.28,74.919
  Layer 1 w0.203: v1(143.554,94.848) 146.127,96.446 cw(c146.556,95.756) 146.556,96.569 158.402,96.569 cw(c158.402,95.507) 158.445,96.568 168.589,96.161 cw(c168.557,95.349) 168.699,96.15 171.367,95.674 ccw(c171.483,96.319) 171.525,95.665 182.135,96.348 ccw(c182.093,97.003) 182.215,96.359 183.938,96.687 cw(c184.061,96.043) 184.365,96.624 v1(185.331,96.118) v1@185.322,96.11
  Bottom Layer w0.254: U2.15@133.594,69.852 133.612,69.87 v1(134.91,69.87) ; v1(143.554,94.848) 143.554,94.796 144.009,94.34 144.009,93.717 142.974,92.682 142.974,83.792 142.748,83.566 142.748,68.537 v1(148.353,68.537)
Fbp2_Filters3-4: C11_Filters3-4.1 IC14.6 IC31_Filters3-4.7 J13_Filters3-4.6 R16_Filters3-4.2 R24_Filters3-4.2 R29_Filters3-4.1 U4.15 | length 90.4
  Top Layer w0.254: v1(134.619,31.389) 135.907,30.101 140.191,30.101 v1(140.97,29.322) ; R24_Filters3-4.2@145.415,30.943 147.147,30.943 C11_Filters3-4.1@147.193,30.897 v1(147.193,29.195) 149.385,27.003 150.563,27.003 152.689,24.877 IC31_Filters3-4.7@154.61,24.877 157.875,24.877 158.649,25.651 158.649,31.01 v1(158.218,31.441) 158.218,32.6 R16_Filters3-4.2@158.242,32.624 R29_Filters3-4.1@158.242,34.118 ; J13_Filters3-4.6@185.293,53.916 185.317,53.892 185.317,52.343 v1(185.342,52.318)
  Layer 1 w0.254: v1(158.218,31.441) 158.822,31.945 cw(c159.258,31.421) 159.352,32.096 169.038,30.748 ccw(c169.132,31.423) 169.184,30.744 v1(185.441,32.004)
  Layer 2 w0.254: v1(185.342,52.318) 185.342,47.926 184.658,47.242 184.658,32.88 185.441,32.098 v1(185.441,32.004)
  Bottom Layer w0.254: U4.15@133.303,31.371 133.321,31.389 v1(134.619,31.389) ; v1(140.97,29.322) 141.036,29.256 141.256,29.256 141.292,29.22 146.914,29.22 v1@146.939,29.195
Fbyp_1: C9_Filters1-2.2 IC4.4 J5.8 R6_Filters1-2.1 U1.12 | length 126.8
  Top Layer w0.203: v1(137.514,79.809) 137.514,79.853 138.152,80.491 139.944,80.491 141.276,81.823 141.276,95.222 144.251,98.196 185.136,98.196 v1(186.152,97.18)
  Top Layer w0.254: J5.8@74.586,65.913 74.066,65.913 72.441,67.538 72.441,70.619 73.729,71.906 81.293,71.906 85.641,67.559 ; 123.336,67.305 127.656,71.624 127.687,71.624 127.771,71.708 129.771,71.708 v1(129.811,71.749) ; v1(129.861,79.841) 129.866,79.846 133.588,79.846 IC4.4@133.593,79.851 v1@137.472,79.851 ; R6_Filters1-2.1@182.766,85.363 v1(186.22,85.363)
  Layer 2 w0.254: v1(129.811,71.749) 129.834,71.772 129.834,79.813 v1(129.861,79.841)
  Bottom Layer w0.203: v1@186.152,85.414 v1(186.152,97.18)
  Bottom Layer w0.254: v1(137.514,79.809) 137.535,79.83 139.009,79.83 U1.12@139.03,79.851
Fbyp_2: C10_Filters1-2.2 IC7.4 J5.6 R27_Filters1-2.1 U2.12 | length 48.7
  Top Layer w0.203: 132.187,66.672 134.522,66.672 v1(135.11,66.084)
  Top Layer w0.254: J5.6@74.586,67.183 74.066,67.183 72.899,68.35 72.899,70.429 73.919,71.449 81.104,71.449 85.452,67.101 ; 123.526,66.847 127.717,71.039 129.314,71.039 130.751,69.603 130.751,68.108 132.187,66.672 ; v1(135.11,66.084) 135.152,66.042 142.753,66.042 144.26,64.535 R27_Filters1-2.1@146.342,64.535
  Bottom Layer w0.254: U2.12@133.594,66.042 133.615,66.063 135.089,66.063 v1(135.11,66.084)
Fbyp_3: C9_Filters3-4.2 IC13.4 J5.4 R6_Filters3-4.1 U3.12 | length 115.5
  Top Layer w0.254: J5.4@74.586,68.453 74.066,68.453 73.356,69.163 73.356,70.24 74.108,70.992 80.915,70.992 85.262,66.644 ; 123.715,66.39 127.856,70.531 128.765,70.531 128.938,70.358 v1(129.032,70.358) ; v1(129.955,41.784) 129.987,41.751 IC13.4@133.352,41.751 133.373,41.73 137.239,41.73 v1(137.26,41.709) ; R6_Filters3-4.1@182.728,44.562 v1(186.609,44.562)
  Layer 1 w0.254: v1(137.26,41.709) 143.777,41.455 ccw(c143.804,42.135) 143.805,41.454 156.211,41.468 ccw(c156.21,42.149) 156.216,41.468 170.948,41.595 ccw(c170.942,42.276) 170.967,41.595 181.635,41.991 ccw(c181.61,42.672) 181.894,42.053 183.52,42.8 ccw(c183.236,43.419) 183.613,42.852 186.182,44.562 v1(186.609,44.562)
  Layer 2 w0.254: v1(129.032,70.358) 129.995,69.395 129.995,41.824 v1(129.955,41.784)
  Bottom Layer w0.254: v1(137.26,41.709) 137.281,41.73 138.755,41.73 U3.12@138.776,41.751
Fbyp_4: C10_Filters3-4.2 IC14.4 J5.2 R27_Filters3-4.1 U4.12 | length 80.6
  Top Layer w0.203: v1(129.607,28.194) 134.228,28.194 v1(134.819,27.603)
  Top Layer w0.254: J5.2@74.586,69.723 75.906,69.723 76.718,70.535 80.725,70.535 85.073,66.187 ; 124.353,65.933 v1(128.27,69.85) ; v1(134.819,27.603) 134.84,27.582 138.706,27.582 IC14.4@138.727,27.561 140.395,27.561 144.222,23.734 R27_Filters3-4.1@146.304,23.734
  Layer 2 w0.203: v1(128.27,69.85) 129.527,68.593 129.527,42.362 129.3,42.136 129.3,42.056 129.299,42.055 129.299,41.512 129.3,41.511 129.3,41.366 129.607,41.059 v1(129.607,28.194)
  Bottom Layer w0.254: U4.12@133.303,27.561 133.324,27.582 134.798,27.582 v1(134.819,27.603)
Fhp1_Filters1-2: IC4.7 IC12_Filters1-2.7 J10_Filters1-2.8 R5_Filters1-2.2 U1.11 | length 114.1
  Top Layer w0.203: v1@136.332,76.064 v1(136.345,76.064) 136.921,75.489 137.784,75.489 137.862,75.411 139.944,75.411 142.496,77.962 142.496,94.717 144.754,96.975 171.754,96.975 172.25,96.479 180.331,96.479 v1(180.987,97.134) ; v1(182.977,62.137) J10_Filters1-2.8@184.061,62.137
  Top Layer w0.254: IC4.7@133.593,76.041 133.605,76.053 v1@136.334,76.053 ; IC12_Filters1-2.7@179.518,66.952 179.52,66.95 180.949,66.95 v1(180.951,66.952) 181.85,66.952 R5_Filters1-2.2@181.877,66.978
  Layer 2 w0.203: v1(180.951,66.952) 182.977,64.926 v1(182.977,62.137)
  Bottom Layer w0.203: v1@180.848,67.016 180.875,67.043 180.875,67.242 180.848,67.269 180.848,72.371 181.902,73.425 181.902,75.457 180.926,76.433 180.926,78.037 180.933,78.044 180.933,97.08 v1(180.987,97.134)
  Bottom Layer w0.254: v1(136.345,76.064) 136.345,77.865 136.753,78.273 136.753,80.012 137.39,80.648 137.39,80.972 137.539,81.121 U1.11@139.03,81.121